# EAGLE board inktime_schem_2d (EAGLE 9.7.0)
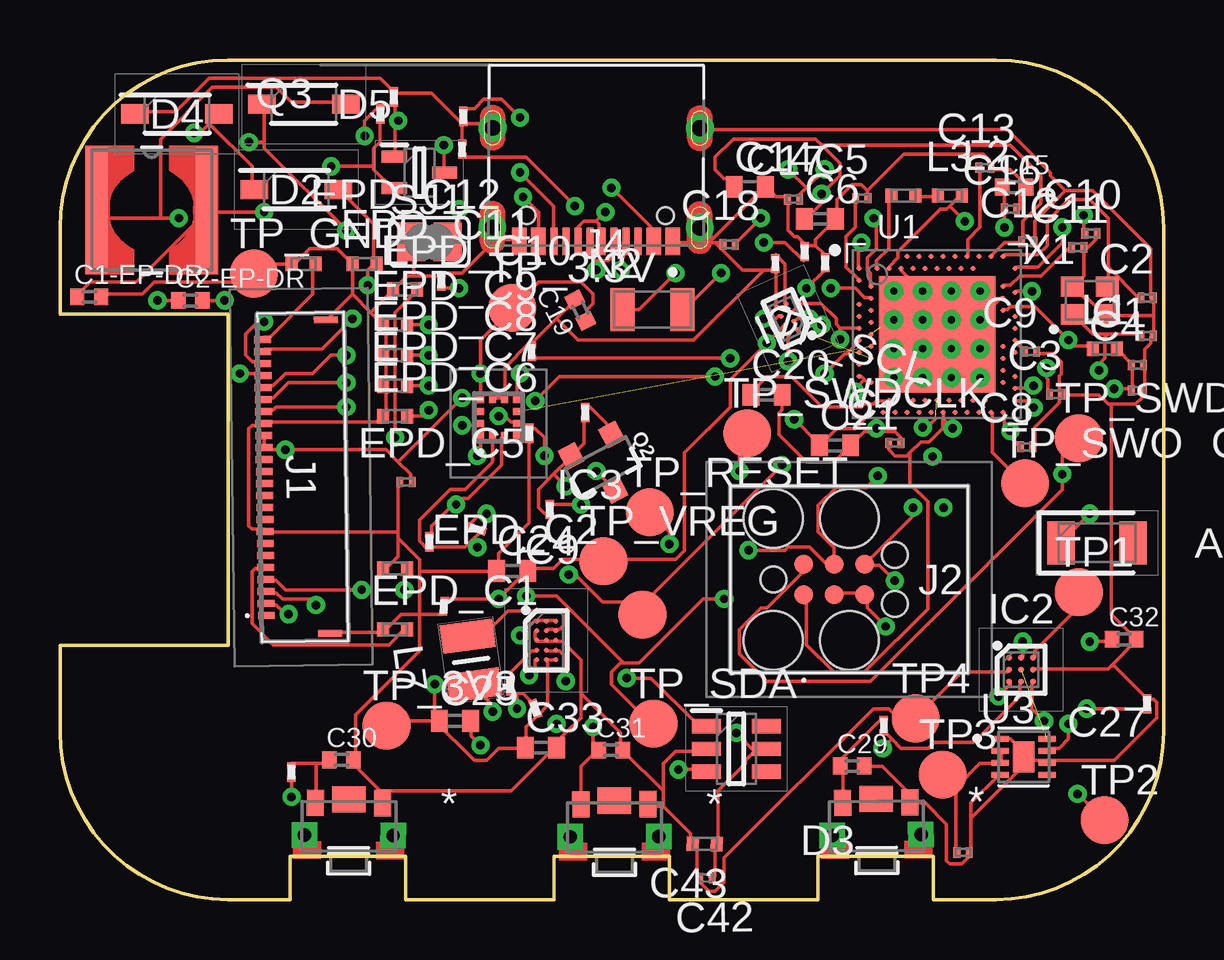
[diagram p0: board, top side]
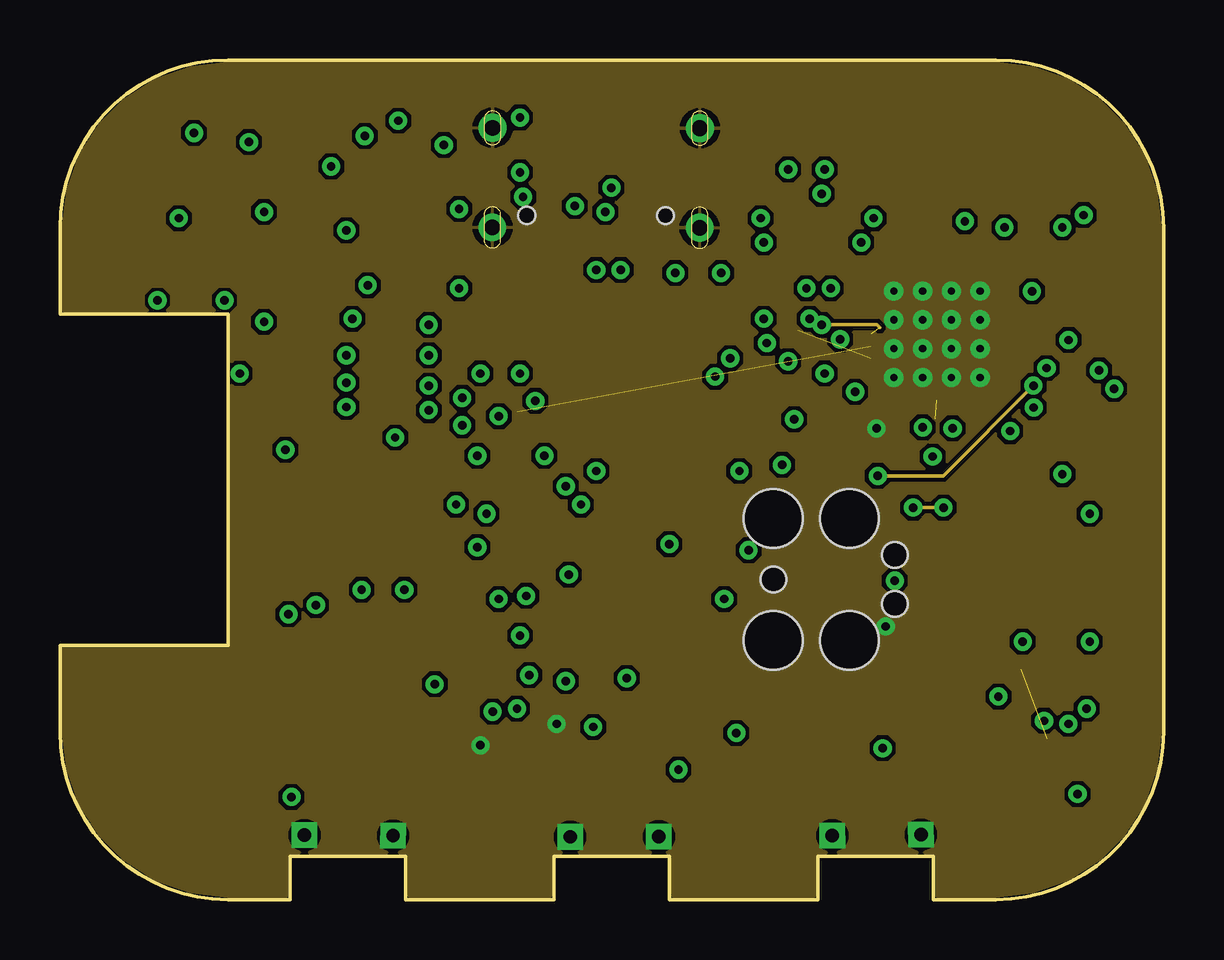
[diagram p1: board, inner layer Route2]
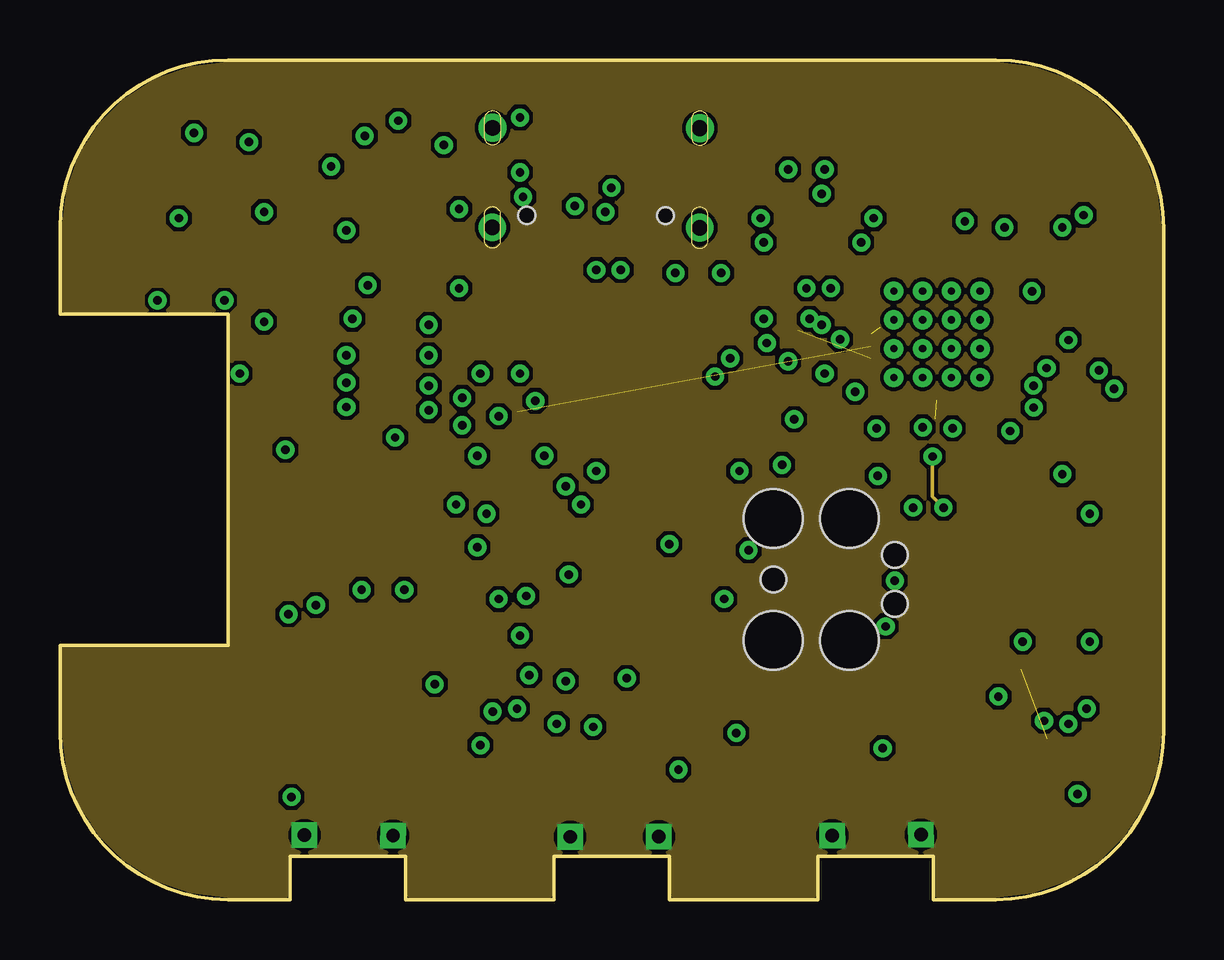
[diagram p2: board, inner layer Route63]
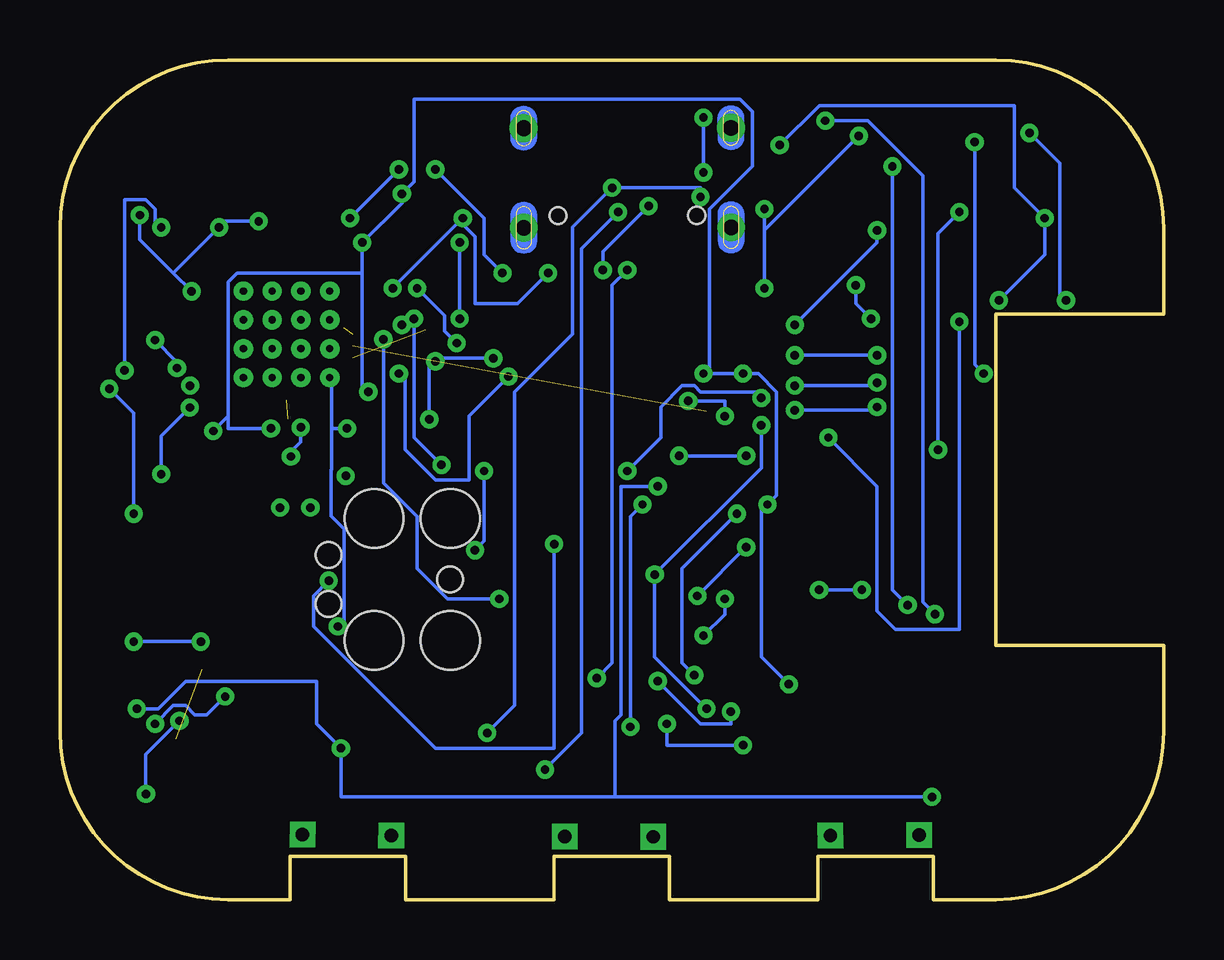
[diagram p3: board, bottom side, seen from below]

Size 46 x 35 mm. Coordinates in mm from the lower left corner, seen from the top.
Outline: 39,0 36.4,0 36.4,1.8 31.6,1.8 31.6,0 25.4,0 25.4,1.8 20.6,1.8 20.6,0 14.4,0 14.4,1.8 9.6,1.8 9.6,0 7,0 arc-90 0,7 0,10.6 7,10.6 7,24.4 0,24.4 0,28 arc-90 7,35 39,35 arc-90 46,28 46,7 arc-90 39,0
Copper layers (1+2*15+16): Top / Route2 / Route63 / Bottom
Stack-up 4 Layer Stack: Top SilkScreen Epoxy Ink / Top SolderMask SR:Green 0.0254mm Dk 4.3 / Top Surface Finish Lead-Free 0.02mm / Top CuFoil:007 0.035mm / Dielectric-1 Prepreg:001 0.064mm / Dielectric-2 Prepreg:001 0.064mm / Route2 CuFoil:007 0.035mm / Dielectric-3 Core:066 0.711mm / Route63 CuFoil:007 0.035mm / Dielectric-4 Prepreg:001 0.064mm / Dielectric-5 Prepreg:001 0.064mm / Bottom CuFoil:007 0.035mm / Bottom Surface Finish Lead-Free 0.02mm / Bottom SolderMask SR:Green 0.0254mm Dk 4.3 / Bottom SilkScreen Epoxy Ink
Design rules: minimum copper width 1mil, minimum drill size 0.35mm, copper clearance wire_polygon to wire_polygon 6mil, copper clearance wire_polygon to pad_smd 6mil, copper clearance wire_polygon to via 6mil, copper clearance pad_smd to pad_smd 6mil, copper clearance pad_smd to via 6mil, copper clearance via to via 6mil, copper clearance smd to pad (same net) 6mil, copper clearance smd to via (same net) 6mil, copper clearance smd to smd (same net) 6mil, dimension clearance 0.002540625mm, via restrict clearance 0mil, restrict clearance 0mil, drill distance 6mil, keepout clearance 0mil

## Footprints (pad centres in the part's own frame; a part is rotated, then mirrored left to right if it is on the bottom)
2450AT18B100E_ANTC3216X140N = smd 1.15 x 1.8: 1 -1.5,0; 2 1.5,0
NORDIC_NRF_3_RESC0201_L = smd 0.28 x 0.43: 1 -0.255,0; 2 0.255,0
PERFECT_0402_0402 = smd 0.6 x 0.7: 1 -0.5,0; 2 0.5,0
ESP32_C6_LIBRARY_1_ESP32_WROVER_EAGLE-LTSPICE_C0402 = smd 0.7 x 0.9: 1 -0.65,0; 2 0.65,0
GRM011R60J152KE01L_1_0201 = smd 0.35 x 0.25: 1 0,0.275; 2 0,-0.275
NORDIC_NRF_3_RESC0402_L = smd 0.5 x 0.6: 1 -0.5,0; 2 0.5,0
ESP32_C6_LIBRARY_5_SOD3716X135N = smd 1.15 x 0.8: 1 -1.75,0; 2 1.75,0
ESP32_C6_LIBRARY_3_SOT95P280X145-6N = smd 1.2 x 0.6: 1 -1.25,0.95; 2 -1.25,0; 3 -1.25,-0.95; 4 1.25,-0.95; 5 1.25,0; 6 1.25,0.95
BQ25180YBGR_BGA8C40P2X4_100X155X50 = smd 0.2 x 0.2: A1 -0.2,0.6; A2 0.2,0.6; B1 -0.2,0.2; B2 0.2,0.2; C1 -0.2,-0.2; C2 0.2,-0.2; D1 -0.2,-0.6; D2 0.2,-0.6
DRV2605YZFR_BGA9C50P3X3_144X144X62 = smd 0.25 x 0.25: A1 -0.5,0.5; A2 0,0.5; A3 0.5,0.5; B1 -0.5,0; B2 0,0; B3 0.5,0; C1 -0.5,-0.5; C2 0,-0.5; C3 0.5,-0.5
BMA423_BMA423 = smd 0.3 x 0.35: 1 -0.75,-0.775; 2 -0.25,-0.775; 3 0.25,-0.775; 4 0.75,-0.775; 7 0.75,0.775; 8 0.25,0.775; 9 -0.25,0.775; 10 -0.75,0.775 | smd 0.35 x 0.3: 5 0.775,-0.25; 6 0.775,0.25; 11 -0.775,0.25; 12 -0.775,-0.25
RT6160AWSC_BGA15C40P3X5_140X230X60 = smd 0.216 x 0.216: A1 -0.4,0.8; A2 0,0.8; A3 0.4,0.8; B1 -0.4,0.4; B2 0,0.4; B3 0.4,0.4; C1 -0.4,0; C2 0,0; C3 0.4,0; D1 -0.4,-0.4; D2 0,-0.4; D3 0.4,-0.4; E1 -0.4,-0.8; E2 0,-0.8; E3 0.4,-0.8
503480-2400_5034802400 = smd 0.3 x 0.7: 1 -5.75,1.525; 2 -5.25,1.525; 3 -4.75,1.525; 4 -4.25,1.525; 5 -3.75,1.525; 6 -3.25,1.525; 7 -2.75,1.525; 8 -2.25,1.525; 9 -1.75,1.525; 10 -1.25,1.525; 11 -0.75,1.525; 12 -0.25,1.525; 13 0.25,1.525; 14 0.75,1.525; 15 1.25,1.525; 16 1.75,1.525; 17 2.25,1.525; 18 2.75,1.525; 19 3.25,1.525; 20 3.75,1.525; 21 4.25,1.525; 22 4.75,1.525; 23 5.25,1.525; 24 5.75,1.525 | smd 0.3 x 1: MP1 -6.54,-1.125; MP2 6.54,-1.125
TC2030-IDC_TC2030IDC = smd 0.783 x 0.783: 1 -0.953,-0.635; 2 -0.953,0.635; 3 0.317,-0.635; 4 0.317,0.635; 5 1.588,-0.635; 6 1.588,0.635 | hole 2.451: -2.223,-2.54; -2.223,2.54; 0.952,-2.54; 0.952,2.54 | hole 1.067: -2.223,0; 2.857,-1.016; 2.857,1.016
KH-TYPE-C-16P_KINGHELM_KH-TYPE-C-16P = smd 0.6 x 1.15: A1_B12 -3.2,4.725; A4_B9 -2.4,4.725; A9_B4 2.4,4.725; A12_B1 3.2,4.725 | smd 0.3 x 1.15: A5 -1.25,4.725; A6 -0.25,4.725; A7 0.25,4.725; A8 1.25,4.725; B5 1.75,4.725; B6 0.75,4.725; B7 -0.75,4.725; B8 -1.75,4.725 | drill 0.65 pad 1.05: SH1 -4.32,0; SH2 4.32,0; SH3 -4.32,4.15; SH4 4.32,4.15 | hole 0.7: -2.89,3.65; 2.89,3.65
NORDIC_NRF_2_RESC0402_L = smd 0.5 x 0.6: 1 -0.5,0; 2 0.5,0
ESP32_C6_LIBRARY_2_IND_4828-WE-TPC_WRE = smd 0.9 x 5.3: 1 -2.286,0; 2 2.286,0
MLP2016SR47MT0S1_INDC2016X100N = smd 1.2 x 2.2: 1 -1.028,0; 2 1.028,0
NORDIC_NRF_1_XTAL_3215_N = smd 1 x 1.8: 1 -1.25,0; 2 1.25,0
ESP32_C6_LIBRARY_4_ESP32_C6_LIBRARY_4_ESP32_C6_LIBRARY_4_ESP32_C6_LIBRARY_4_ESP32_WROVER_SPARKFUN-DISCRETESEMI_SOT23-3 = smd 0.8 x 0.9: 1 -0.95,-1; 2 0.95,-1; 3 0,1.1
ESP32_C6_LIBRARY_6_SOT65P210X110-3N = smd 1.05 x 0.5: 1 -1.05,0.65; 2 -1.05,-0.65; 3 1.05,0
ERA-1AEB3401C_0201 = smd 0.35 x 0.25: 1 0,0.275; 2 0,-0.275
CPF0201D7K68C1_0201 = smd 0.35 x 0.25: 1 0,0.275; 2 0,-0.275
ESP32_C6_LIBRARY_7_JUMPER_SJ = smd 1.168 x 1.6: 1 -0.762,0; 2 0.762,0
2025-10-22_07-23-44_LIBRARY_SW_EVP-AKE31A_PAN = smd 0.711 x 1.092: 1 -1.4,-0.972; 2 1.4,-0.972 | drill 0.559 pad 0.914 square: 3 -1.848,0.381; 4 1.848,0.381 | smd 1.397 x 1.092: 5 0,-1.124
HECTOR_WATCH_1_TP20R = smd 2 x 2: TP 0,0
NORDIC_NRF_4_AQFN50P700X700X85_HS-74N = smd 4.85 x 4.85: P$74 0,0 | drill 0.3 pad 0.6: P$75 -1.8,1.8; P$76 -0.6,1.8; P$77 0.6,1.8; P$78 1.8,1.8; P$79 -1.8,0.6; P$80 -0.6,0.6; P$81 0.6,0.6; P$82 1.8,0.6; P$83 -1.8,-0.6; P$84 -0.6,-0.6; P$85 0.6,-0.6; P$86 1.8,-0.6; P$87 -1.8,-1.8; P$88 -0.6,-1.8; P$89 0.6,-1.8; P$90 1.8,-1.8 | smd 0.2 x 0.2: P$A8 -1.25,3.25; P$A10 -0.75,3.25; P$A12 -0.25,3.25; P$A14 0.25,3.25; P$A16 0.75,3.25; P$A18 1.25,3.25; P$A20 1.75,3.25; P$A22 2.25,3.25; P$A23 2.75,3.25; P$AA24 3.25,-2.25; P$AB2 -2.75,-2.5; P$AC5 -2,-2.75; P$AC9 -1,-2.75; P$AC11 -0.5,-2.75; P$AC13 0,-2.75; P$AC15 0.5,-2.75; P$AC17 1,-2.75; P$AC19 1.5,-2.75; P$AC21 2,-2.75; P$AC24 3.25,-2.75; P$AD2 -2.75,-3.25; P$AD4 -2.25,-3.25; P$AD6 -1.75,-3.25; P$AD8 -1.25,-3.25; P$AD10 -0.75,-3.25; P$AD12 -0.25,-3.25; P$AD14 0.25,-3.25; P$AD16 0.75,-3.25; P$AD18 1.25,-3.25; P$AD20 1.75,-3.25; P$AD22 2.25,-3.25; P$AD23 2.75,-3.25; P$B1 -3.25,2.75; P$B3 -2.5,2.75; P$B5 -2,2.75; P$B7 -1.5,2.75; P$B9 -1,2.75; P$B11 -0.5,2.75; P$B13 0,2.75; P$B15 0.5,2.75; P$B17 1,2.75; P$B19 1.5,2.75; P$B24 3.25,2.75; P$C1 -3.25,2.25; P$D2 -2.75,2; P$D23 2.75,2; P$E24 3.25,1.75; P$F2 -2.75,1.5; P$F23 2.75,1.5; P$G1 -3.25,1.25; P$H2 -2.75,1; P$H23 2.75,1; P$J1 -3.25,0.75; P$J24 3.25,0.75; P$K2 -2.75,0.5; P$L1 -3.25,0.25; P$L24 3.25,0.25; P$M2 -2.75,0; P$N1 -3.25,-0.25; P$N24 3.25,-0.25; P$P2 -2.75,-0.5; P$P23 2.75,-0.5; P$R1 -3.25,-0.75; P$R24 3.25,-0.75; P$T2 -2.75,-1; P$T23 2.75,-1; P$U1 -3.25,-1.25; P$U24 3.25,-1.25; P$V23 2.75,-1.5; P$W1 -3.25,-1.75; P$W24 3.25,-1.75; P$Y2 -2.75,-2; P$Y23 2.75,-2
ESP32_C6_LIBRARY_SON50P200X200X80-9N = smd 0.76 x 0.27: 1 -0.985,0.75; 2 -0.985,0.25; 3 -0.985,-0.25; 4 -0.985,-0.75; 5 0.985,-0.75; 6 0.985,-0.25; 7 0.985,0.25; 8 0.985,0.75 | smd 0.9 x 1.3: 9 0,0
NORDIC_NRF_BT-XTAL_2016_N = smd 0.95 x 0.85: 1 -0.725,-0.575; 2 0.725,-0.575; 3 0.725,0.575; 4 -0.725,0.575

## Placement (x,y rotation side)
ANT1  2450AT18B100E_2450AT18B100E  [2450AT18B100E_ANTC3216X140N]  43.23,14.87 0 top
C1  12pF  [NORDIC_NRF_3_RESC0201_L]  45.31,23.5 0 top
C1-EP-DR  10uF  [PERFECT_0402_0402]  1.22,25.13 0 top
C2  12pF  [NORDIC_NRF_3_RESC0201_L]  45.31,25.08 0 top
C2-EP-DR  4.7uF  [PERFECT_0402_0402]  5.44,24.98 0 top
C3  1pF  [NORDIC_NRF_3_RESC0201_L]  41.5,21.06 0 top
C4  1pF  [NORDIC_NRF_3_RESC0201_L]  44.91,22.28 0 top
C5  100nF  [NORDIC_NRF_3_RESC0201_L]  33.43,29.24 0 top
C6  4.7uF  [ESP32_C6_LIBRARY_1_ESP32_WROVER_EAGLE-LTSPICE_C0402]  31.68,28.38 0 top
C7  100nF  [NORDIC_NRF_3_RESC0201_L]  34.8,19.03 0 top
C8  100nF  [NORDIC_NRF_3_RESC0201_L]  40.3,18.87 0 top
C9  820pF  [NORDIC_NRF_3_RESC0201_L]  40.45,22.84 0 top
C10  N.C.  [NORDIC_NRF_3_RESC0201_L]  42.98,27.77 0 top
C11  100pF  [NORDIC_NRF_3_RESC0201_L]  42.42,27.19 0 top
C12  100nF  [NORDIC_NRF_3_RESC0201_L]  40.34,27.41 0 top
C13  N.C.  [NORDIC_NRF_3_RESC0201_L]  38.56,30.51 0 top
C14  4.7uF  [ESP32_C6_LIBRARY_1_ESP32_WROVER_EAGLE-LTSPICE_C0402]  28.75,29.7 0 top
C15  1.0uF  [PERFECT_0402_0402]  39.78,29.7 0 top
C16  47nF  [NORDIC_NRF_3_RESC0201_L]  39.62,28.79 0 top
C17  12pF  [NORDIC_NRF_3_RESC0201_L]  30.58,29.19 0 top
C18  12pF  [NORDIC_NRF_3_RESC0201_L]  27.89,27.31 0 top
C19  100nF  [PERFECT_0402_0402]  21.69,24.57 117.1 top
C20  4.7uF  [ESP32_C6_LIBRARY_1_ESP32_WROVER_EAGLE-LTSPICE_C0402]  29.46,21.04 0 top
C21  4.7uF  [ESP32_C6_LIBRARY_1_ESP32_WROVER_EAGLE-LTSPICE_C0402]  32.31,18.93 0 top
C22  N.C.  [NORDIC_NRF_3_RESC0201_L]  44.91,21.22 0 top
C23  0.1uF  [GRM011R60J152KE01L_1_0201]  16,12.23 355.6 top
C24  10uF  [ESP32_C6_LIBRARY_1_ESP32_WROVER_EAGLE-LTSPICE_C0402]  18.85,13.7 0 top
C25  22uF  [ESP32_C6_LIBRARY_1_ESP32_WROVER_EAGLE-LTSPICE_C0402]  16.46,7.45 0 top
C27  0.1uF  [NORDIC_NRF_3_RESC0201_L]  37.64,1.96 0 top
C29  1uF  [PERFECT_0402_0402]  33.02,5.57 0 top
C30  1uF  [PERFECT_0402_0402]  11.73,5.82 0 top
C31  1uF  [PERFECT_0402_0402]  22.96,6.23 0 top
C32  1uF  [PERFECT_0402_0402]  44.35,10.85 0 top
C33  22uF  [ESP32_C6_LIBRARY_1_ESP32_WROVER_EAGLE-LTSPICE_C0402]  20.04,6.33 0 top
C34  0.1uF  [GRM011R60J152KE01L_1_0201]  45.31,8.16 0 top
C37  1uF  [GRM011R60J152KE01L_1_0201]  31.04,27.01 0 top
C38  1uF  [GRM011R60J152KE01L_1_0201]  19.66,22.84 0 top
C39  10uF  [GRM011R60J152KE01L_1_0201]  31.9,26.55 0 top
C42  0.1uF  [NORDIC_NRF_3_RESC0201_L]  26.92,0.9 180.8 top
C43  4.7uF  [NORDIC_NRF_3_RESC0402_L]  26.87,2.32 179.3 top
D2  MBR0530  [ESP32_C6_LIBRARY_5_SOD3716X135N]  9.86,29.6 0 top
D3  ESP32_C6_LIBRARY_3_USBLC6-2SC6Y  [ESP32_C6_LIBRARY_3_SOT95P280X145-6N]  28.19,6.28 0 top
D4  MBR0530  [ESP32_C6_LIBRARY_5_SOD3716X135N]  4.88,32.75 0 top
D5  MBR0530  [ESP32_C6_LIBRARY_5_SOD3716X135N]  10.16,33.15 0 top
EPD_C1  1uF  [NORDIC_NRF_3_RESC0402_L]  13.97,11.26 0 top
EPD_C2  1uF  [NORDIC_NRF_3_RESC0402_L]  13.97,13.8 0 top
EPD_C5  0.1uF  [NORDIC_NRF_3_RESC0201_L]  14.43,17.41 0 top
EPD_C6  1uF  [NORDIC_NRF_3_RESC0402_L]  13.97,20.15 0 top
EPD_C7  1uF  [NORDIC_NRF_3_RESC0402_L]  13.97,21.42 0 top
EPD_C8  1uF  [NORDIC_NRF_3_RESC0402_L]  13.97,22.69 0 top
EPD_C9  1uF  [NORDIC_NRF_3_RESC0402_L]  13.97,23.96 0 top
EPD_C10  1uF  [NORDIC_NRF_3_RESC0402_L]  14.38,25.43 0 top
EPD_C11  1uF  [NORDIC_NRF_3_RESC0402_L]  12.7,26.5 0 top
EPD_C12  1uF  [NORDIC_NRF_3_RESC0402_L]  10.16,26.5 0 top
IC1  BQ25180YBGR_BQ25180YBGR  [BQ25180YBGR_BGA8C40P2X4_100X155X50]  30.33,24.21 204.1 top
IC2  DRV2605YZFR_DRV2605YZFR  [DRV2605YZFR_BGA9C50P3X3_144X144X62]  40.07,9.58 0 top
IC3  BMA423_BMA423  [BMA423_BMA423]  18.28,20.1 0 top
IC9  RT6160AWSC_RT6160AWSC  [RT6160AWSC_BGA15C40P3X5_140X230X60]  20.27,10.8 0 top
J1  503480-2400_503480-2400  [503480-2400_5034802400]  10.05,17.61 90.8 top
J2  TC2030-IDC_TC2030-IDC  [TC2030-IDC_TC2030IDC]  31.95,13.34 0 top
J4  KH-TYPE-C-16P_KH-TYPE-C-16P  [KH-TYPE-C-16P_KINGHELM_KH-TYPE-C-16P]  22.35,32.16 179.9 top
L1  3.9nH  [NORDIC_NRF_2_RESC0402_L]  43.56,22.96 0 top
L2  10uH  [NORDIC_NRF_2_RESC0402_L]  35.15,29.34 0 top
L3  15nH  [NORDIC_NRF_2_RESC0402_L]  37.08,29.34 0 top
L5  68uH  [ESP32_C6_LIBRARY_2_IND_4828-WE-TPC_WRE]  3.82,28.74 0 top
L7  MLP2016SR47MT0S1_FTC252012SR47MBCA  [MLP2016SR47MT0S1_INDC2016X100N]  17.13,9.97 277.8 top
N2  32.768kHz  [NORDIC_NRF_1_XTAL_3215_N]  24.7,24.59 0 top
Q2  20V/4.2A/52mΩ/1.4W  [ESP32_C6_LIBRARY_4_ESP32_C6_LIBRARY_4_ESP32_C6_LIBRARY_4_ESP32_C6_LIBRARY_4_ESP32_WROVER_SPARKFUN-DISCRETESEMI_SOT23-3]  22.62,18.06 207.9 top
Q3  ESP32_C6_LIBRARY_6_SI1308EDL-T1-GE3  [ESP32_C6_LIBRARY_6_SOT65P210X110-3N]  14.99,30.31 0 top
R1_EP_DR  0.47  [ERA-1AEB3401C_0201]  13.36,32.75 0 top
R1_USB  5K1  [CPF0201D7K68C1_0201]  16.76,31.28 0 top
R2  0  [ERA-1AEB3401C_0201]  17.37,15.45 72.9 top
R2_EP_DR  10K  [ERA-1AEB3401C_0201]  13.92,33.46 0 top
R2_USB  5K1  [CPF0201D7K68C1_0201]  16.81,32.65 0 top
R3  0  [ERA-1AEB3401C_0201]  19.56,19.44 0 top
R4  0  [ERA-1AEB3401C_0201]  18.77,8.91 0 top
R5  10k  [ERA-1AEB3401C_0201]  9.65,5.32 0 top
R7  10k  [ERA-1AEB3401C_0201]  34.34,7.25 0 top
R8  10k  [ERA-1AEB3401C_0201]  20.42,16.25 0 top
R9  10k  [CPF0201D7K68C1_0201]  29.82,26.51 0 top
R17  3k3  [ERA-1AEB3401C_0201]  19.81,7.96 198.5 top
R18  3k3  [ERA-1AEB3401C_0201]  15.39,14.92 0 top
R_PWR_EPD  10K  [CPF0201D7K68C1_0201]  21.89,20.3 0 top
R_TYPE_SEL  2.2  [ERA-1AEB3401C_0201]  15.9,25.79 0 top
SJ1  [ESP32_C6_LIBRARY_7_JUMPER_SJ]  15.39,27.41 0 top
SW_DN  2025-10-22_07-23-44_LIBRARY_EVP-AKE31ASW_EVP-AKE31A_PAN  [2025-10-22_07-23-44_LIBRARY_SW_EVP-AKE31A_PAN]  34.04,3.07 180.6 top
SW_ENT  2025-10-22_07-23-44_LIBRARY_EVP-AKE31ASW_EVP-AKE31A_PAN  [2025-10-22_07-23-44_LIBRARY_SW_EVP-AKE31A_PAN]  23.11,3 180.2 top
SW_UP  2025-10-22_07-23-44_LIBRARY_EVP-AKE31ASW_EVP-AKE31A_PAN  [2025-10-22_07-23-44_LIBRARY_SW_EVP-AKE31A_PAN]  12.04,3.06 179.7 top
TP1  HECTOR_WATCH_1_TPTP20R  [HECTOR_WATCH_1_TP20R]  42.47,12.81 0 top
TP2  HECTOR_WATCH_1_TPTP20R  [HECTOR_WATCH_1_TP20R]  43.55,3.31 0 top
TP3  HECTOR_WATCH_1_TPTP20R  [HECTOR_WATCH_1_TP20R]  36.8,5.21 0 top
TP4  HECTOR_WATCH_1_TPTP20R  [HECTOR_WATCH_1_TP20R]  35.67,7.55 0 top
TP_3.3V  HECTOR_WATCH_1_TPTP20R  [HECTOR_WATCH_1_TP20R]  18.85,24.67 0 top
TP_3V3  HECTOR_WATCH_1_TPTP20R  [HECTOR_WATCH_1_TP20R]  13.61,7.25 0 top
TP_GND  HECTOR_WATCH_1_TPTP20R  [HECTOR_WATCH_1_TP20R]  8.08,26.09 0 top
TP_RESET  HECTOR_WATCH_1_TPTP20R  [HECTOR_WATCH_1_TP20R]  24.59,16.14 0 top
TP_SCL  HECTOR_WATCH_1_TPTP20R  [HECTOR_WATCH_1_TP20R]  24.28,11.87 341.9 top
TP_SDA  HECTOR_WATCH_1_TPTP20R  [HECTOR_WATCH_1_TP20R]  24.74,7.33 0 top
TP_SWDCLK  HECTOR_WATCH_1_TPTP20R  [HECTOR_WATCH_1_TP20R]  28.65,19.44 0 top
TP_SWDIO  HECTOR_WATCH_1_TPTP20R  [HECTOR_WATCH_1_TP20R]  42.47,19.24 0 top
TP_SWO  HECTOR_WATCH_1_TPTP20R  [HECTOR_WATCH_1_TP20R]  40.23,17.36 0 top
TP_VREG  HECTOR_WATCH_1_TPTP20R  [HECTOR_WATCH_1_TP20R]  22.66,14.11 0 top
U1  NORDIC_NRF_4_NRF52840_QF  [NORDIC_NRF_4_AQFN50P700X700X85_HS-74N]  36.55,23.56 0 top
U3  ESP32_C6_LIBRARY_MAX17048G+T10  [ESP32_C6_LIBRARY_SON50P200X200X80-9N]  40.17,5.95 0 top
X1  32MHz  [NORDIC_NRF_BT-XTAL_2016_N]  42.93,24.98 0 top

## Library data of the parts
ANT1 = InkTime_v5; ARROW_PART_NUMBER: 2450AT18B100E; ARROW_PRICE-STOCK: https://www.arrow.com/en/products/2450at18b100e/johanson-dielectrics?utm_currency=USD&region=nac; DESCRIPTION: Antennas 2.45GHz ANTENNA; HEIGHT: 1.4mm; MANUFACTURER_NAME: JOHANSON TECHNOLOGY; MANUFACTURER_PART_NUMBER: 2450AT18B100E; MOUSER_PART_NUMBER: 609-2450AT18B100E; MOUSER_PRICE-STOCK: https://www.mouser.co.uk/ProductDetail/Johanson-Technology/2450AT18B100E?qs=yCnrNFeXz%252Bh5MFsFIXGZGA%3D%3D
C1 C1-EP-DR C2 C2-EP-DR C3-C5 C7-C13 C15-C19 C22 C23 C27 C29-C32 C34 C37-C39 C42 C43 EPD_C1 EPD_C2 EPD_C5-EPD_C12 L1-L3 N2 R1_EP_DR R1_USB R2 R2_EP_DR R2_USB R3-R5 R7-R9 R17 R18 R_PWR_EPD R_TYPE_SEL SJ1 TP1-TP4 TP_3.3V TP_3V3 TP_GND TP_RESET TP_SCL TP_SDA TP_SWDCLK TP_SWDIO TP_SWO TP_VREG U1 X1 = InkTime_v5
C6 C14 C20 C21 C24 C25 C33 = InkTime_v5; SPICEMODEL: NONE; SPICEPREFIX: C
D2 D4 D5 = InkTime_v5; AVAILABILITY: In Stock; CHECK_PRICES: https://www.snapeda.com/parts/MBR0530/Onsemi/view-part/?ref=eda; DESCRIPTION: Diode Schottky 30 V 500mA Surface Mount SOD-123; MF: ON Semiconductor; MP: MBR0530; PACKAGE: SOD-123-2 ON Semiconductor; PRICE: None; PURCHASE-URL: https://www.snapeda.com/api/url_track_click_mouser/?unipart_id=179458&manufacturer=ON Semiconductor&part_name=MBR0530&search_term=None; SNAPEDA_LINK: https://www.snapeda.com/parts/MBR0530/Onsemi/view-part/?ref=snap
D3 = InkTime_v5; AVAILABILITY: In Stock; CHECK_PRICES: https://www.snapeda.com/parts/USBLC6-2SC6Y/STMicroelectronics/view-part/?ref=eda; DESCRIPTION: 17V Clamp 5A (8/20µs) Ipp Tvs Diode Surface Mount SOT-23-6; MF: STMicroelectronics; MP: USBLC6-2SC6Y; PACKAGE: SOT-23-6 STMicroelectronics; PRICE: None; SNAPEDA_LINK: https://www.snapeda.com/parts/USBLC6-2SC6Y/STMicroelectronics/view-part/?ref=snap
IC1 = InkTime_v5; ARROW_PART_NUMBER: BQ25180YBGR; ARROW_PRICE-STOCK: https://www.arrow.com/en/products/bq25180ybgr/texas-instruments?utm_currency=USD&region=nac; DESCRIPTION: Charger IC Lithium Ion/Polymer, Lithium Iron Phosphate 8-DSBGA (1.6x1.1); HEIGHT: 0.5mm; MANUFACTURER_NAME: Texas Instruments; MANUFACTURER_PART_NUMBER: BQ25180YBGR; MOUSER_PART_NUMBER: 595-BQ25180YBGR; MOUSER_PRICE-STOCK: https://www.mouser.co.uk/ProductDetail/Texas-Instruments/BQ25180YBGR?qs=doiCPypUmgEWjAK%252BJAX6Tw%3D%3D
IC2 = InkTime_v5; ARROW_PART_NUMBER: DRV2605YZFR; ARROW_PRICE-STOCK: https://www.arrow.com/en/products/drv2605yzfr/texas-instruments?region=nac; DESCRIPTION: Haptic Driver for ERM/LRA with Built-In Library and Smart Loop Architecture; HEIGHT: 0.625mm; MANUFACTURER_NAME: Texas Instruments; MANUFACTURER_PART_NUMBER: DRV2605YZFR
IC3 = InkTime_v5; ARROW_PART_NUMBER: BMA423; ARROW_PRICE-STOCK: https://www.arrow.com/en/products/bma423/bosch; DESCRIPTION: Accelerometers Triaxial low-g 12bit Acceleration Sensor; HEIGHT: 1mm; MANUFACTURER_NAME: BOSCH; MANUFACTURER_PART_NUMBER: BMA423; MOUSER_PART_NUMBER: 262-BMA423; MOUSER_PRICE-STOCK: https://www.mouser.co.uk/ProductDetail/Bosch-Sensortec/BMA423?qs=HXFqYaX1Q2xC%252BSgeGoX3mg%3D%3D
IC9 = InkTime_v5; DESCRIPTION: Buck-Boost Regulator Positive Output Step-Up/Step-Down I2C DC-DC Controller IC 15-WL-CSP (BSC) (1.4x2.3); HEIGHT: 0.6mm; MANUFACTURER_NAME: RICHTEK; MANUFACTURER_PART_NUMBER: RT6160AWSC; MOUSER_PART_NUMBER: 835-RT6160AWSC; MOUSER_PRICE-STOCK: https://www.mouser.co.uk/ProductDetail/Richtek/RT6160AWSC?qs=amGC7iS6iy%2FLd9PSoixZXQ%3D%3D
J1 = InkTime_v5; DESCRIPTION: FFC & FPC Connectors 0.5mm FPC RA SMT Dual Contact 24Ckt; HEIGHT: 1.87mm; MANUFACTURER_NAME: Molex; MANUFACTURER_PART_NUMBER: 503480-2400; MOUSER_PART_NUMBER: 538-503480-2400; MOUSER_PRICE-STOCK: https://www.mouser.co.uk/ProductDetail/Molex/503480-2400?qs=OAhjpuo3Vu7efIoxFh9AOw%3D%3D
J2 = InkTime_v5; DESCRIPTION: CABLE ADAPTER 6 POS; HEIGHT: 19mm; MANUFACTURER_NAME: Tag Connect; MANUFACTURER_PART_NUMBER: TC2030-IDC
J4 = InkTime_v5; AVAILABILITY: Not in stock; CHECK_PRICES: https://www.snapeda.com/parts/KH-TYPE-C-16P/Kinghelm/view-part/?ref=eda; MF: kinghelm; MP: KH-TYPE-C-16P; PACKAGE: None; PRICE: None; SNAPEDA_LINK: https://www.snapeda.com/parts/KH-TYPE-C-16P/Kinghelm/view-part/?ref=snap
L5 = InkTime_v5; COPYRIGHT: Copyright (C) 2024 Ultra Librarian. All rights reserved.; MANUFACTURER_PART_NUMBER: 744043680; MFR_NAME: Wurth Electronics
L7 = InkTime_v5; DESCRIPTION: SMD / SMT Inductors (Coils), L=0.47?H, L x W x T :; HEIGHT: 1mm; JLCPCB: https://jlcpcb.com/partdetail/6763488-FTC252012SR47MBCA/C5832368; MANUFACTURER_NAME: TDK; MANUFACTURER_PART_NUMBER: FTC252012SR47MBCA
Q2 = InkTime_v5; PROD_ID: TRAN-14388
Q3 = InkTime_v5; AVAILABILITY: In Stock; CHECK_PRICES: https://www.snapeda.com/parts/SI1308EDL-T1-GE3/Vishay+Siliconix/view-part/?ref=eda; DESCRIPTION: Si1308EDL-T1-GE3 N-channel MOSFET Transistor, 1.5 A, 30 V, 3-Pin SC-70 | Siliconix / Vishay SI1308EDL-T1-GE3; MF: Vishay Siliconix; MP: SI1308EDL-T1-GE3; PACKAGE: SOT-323 Vishay Semiconductor; PRICE: None; PURCHASE-URL: https://www.snapeda.com/api/url_track_click_mouser/?unipart_id=274603&manufacturer=Vishay Siliconix&part_name=SI1308EDL-T1-GE3&search_term=None; SNAPEDA_LINK: https://www.snapeda.com/parts/SI1308EDL-T1-GE3/Vishay+Siliconix/view-part/?ref=snap
SW_DN SW_ENT SW_UP = InkTime_v5; COPYRIGHT: Copyright (C) 2025 Ultra Librarian. All rights reserved.; DIGI-KEY_PART_NUMBER_1: P123437TR-ND; DIGI-KEY_PART_NUMBER_2: P123437CT-ND; DIGI-KEY_PART_NUMBER_3: P123437DKR-ND; MANUFACTURER_NAME: Panasonic; MANUFACTURER_PART_NUMBER: EVP-AKE31A
U3 = InkTime_v5; AVAILABILITY: In Stock; CHECK_PRICES: https://www.snapeda.com/parts/MAX17048G+T10/Analog+Devices/view-part/?ref=eda; DESCRIPTION: 3µA 1-Cell/2-Cell Fuel Gauge with ModelGauge; MF: Analog Devices; MP: MAX17048G+T10; PACKAGE: TDFN-8 Maxim; PRICE: None; PURCHASE-URL: https://www.snapeda.com/api/url_track_click_mouser/?unipart_id=329239&manufacturer=Analog Devices&part_name=MAX17048G+T10&search_term=None; SNAPEDA_LINK: https://www.snapeda.com/parts/MAX17048G+T10/Analog+Devices/view-part/?ref=snap

## Nets
3V3/1.7D: C34.2 IC2.C2 Q2.2 R5.2 R7.2 R8.2 R_PWR_EPD.2
3V3/2.4A: C6.1 C7.1 C8.1 C12.1 C14.1 C19.1 C25.1 C33.1 IC3.3 IC3.7 IC3.10 IC9.E2 IC9.E3 J2.1 R17.1 R18.1 TP_3.3V.TP TP_3V3.TP U1.P$A22 U1.P$AD14 U1.P$AD23 U1.P$B1 U1.P$W1 U1.P$Y2
ALERT/1.6C: U3.5
ALERT/2.5C: U1.P$J24
D+/1.5D: D3.4
D+/2.7D: U1.P$AD6
D-/1.5D: D3.6
D-/2.7D: U1.P$AD4
DN: D3.1 J4.A7 J4.B7
DP: D3.3 J4.A6 J4.B6
EPD_3V3: C1-EP-DR.1 EPD_C5.2 J1.15 J1.16 L5.2 Q2.3
EPD_BUSY/1.5D: J1.9
EPD_BUSY/2.2D: U1.P$AC11
EPD_CS/1.4C: J1.12
EPD_CS/2.2D: U1.P$K2
EPD_DC/1.5D: J1.11
EPD_DC/2.2D: U1.P$AD10
EPD_RST/1.5D: J1.10
EPD_RST/2.2D: U1.P$AD12
GDR: J1.2 Q3.1 R2_EP_DR.2
GND: C1-EP-DR.2 C1.2 C2.2 C3.2 C4.2 C5.2 C6.2 C7.2 C8.2 C9.2 C10.2 C11.2 C12.2 C13.2 C14.2 C15.2 C16.2 C17.1 C18.1 C19.2 C20.2 C21.2 C22.2 C23.2 C24.1 C25.2 C27.2 C29.2 C30.2 C31.2 C32.2 C33.2 C34.1 C37.1 C38.1 C39.1 C42.2 C43.2 D3.2 D4.1 EPD_C1.1 EPD_C2.1 EPD_C5.1 EPD_C6.1 EPD_C7.1 EPD_C8.1 EPD_C9.1 EPD_C10.1 EPD_C11.1 EPD_C12.1 IC1.D2 IC2.B1 IC2.B3 IC3.8 IC3.9 IC9.B1 IC9.C1 IC9.C2 IC9.C3 J1.8 J1.17 J1.MP1 J1.MP2 J2.3 J2.5 J4.A1_B12 J4.A12_B1 J4.SH1 J4.SH2 J4.SH3 J4.SH4 R1_USB.1 R2_EP_DR.1 R2_USB.2 R3.2 R9.2 R_TYPE_SEL.1 SJ1.1 SW_DN.1 SW_ENT.1 SW_UP.1 TP4.TP TP_GND.TP U1.P$74 U1.P$75 U1.P$76 U1.P$77 U1.P$78 U1.P$79 U1.P$80 U1.P$81 U1.P$82 U1.P$83 U1.P$84 U1.P$85 U1.P$86 U1.P$87 U1.P$88 U1.P$89 U1.P$90 U1.P$B7 U1.P$F23 U3.1 U3.4 U3.6 U3.9 X1.2 X1.4
HAPTIC_EN/1.4C: IC2.A1
HAPTIC_EN/2.6A: U1.P$U1
IMU_INT1: IC3.5 U1.P$N1
IMU_INT2: IC3.6 U1.P$P2
LX1: IC9.B2 IC9.B3 L7.1
LX2: IC9.D2 IC9.D3 L7.2
MOSI/1.5B: J1.14
MOSI/2.2D: U1.P$B13
N$1: IC1.D1 R9.1
N$2: IC3.1 R3.1
N$3: L2.2 L3.1
N$4: C2-EP-DR.2 D5.2 L5.1 Q3.3
N$6: IC9.D1 R4.1
N$8: IC9.E1 R2.1
N$10: ANT1.1 C4.1 C22.1 L1.2
N$11: C20.1 U1.P$AC5
N$12: C2-EP-DR.1 D2.1 D4.2
N$13: C5.1 U1.P$C1
N$14: C17.2 N2.2 U1.P$D2
N$15: C18.2 N2.1 U1.P$F2
N$16: C11.1 U1.P$D23
N$17: L2.1 U1.P$B3
N$18: C10.1 C15.1 C16.1 L3.2 U1.P$B5 U1.P$E24
N$20: C2.1 U1.P$A23 X1.3
N$21: C13.1 U1.P$A18
N$22: C1.1 U1.P$B24 X1.1
N$23: C32.1 IC2.A2
N$24: C3.1 L1.1 U1.P$H23
N$27: C9.1 U1.P$N24
N$28: EPD_C2.2 J1.4
N$29: EPD_C1.2 J1.5
N$30: J4.B5 R2_USB.1
N$31: R1_EP_DR.1 R_TYPE_SEL.2 SJ1.2
N$33: J4.A5 R1_USB.2
N$41: EPD_C6.2 J1.18
N$42: EPD_C7.2 J1.19
N$43: EPD_C8.2 J1.20
N$45: EPD_C10.2 J1.22
N$47: EPD_C12.2 J1.24
OUT+: IC2.A3 TP1.TP
OUT-: IC2.C3 TP2.TP
P0.04: U1.P$J1
P0.09: U1.P$L24
P0.13/1.5D: C30.1 R5.1 SW_UP.2
P0.13/2.6C: U1.P$AD8
P0.14/1.5D: C31.1 R8.1 SW_ENT.2
P0.19: U1.P$AC15
P0.20: U1.P$AD16
P0.21: U1.P$AC17
P0.22: U1.P$AD18
P0.23: U1.P$AC19
P0.24: U1.P$AD20
P0.25: U1.P$AC21
P0.26: U1.P$G1
P0.27: U1.P$H2
P0.28: U1.P$B11
P0.29: U1.P$A10
P0.30: U1.P$B9
P0.31: U1.P$A8
P1.01/1.6C: Q2.1 R_PWR_EPD.1
P1.01/2.4B: U1.P$Y23
P1.02/1.5D: C29.1 R7.1 SW_DN.2
P1.02/2.8C: U1.P$W24
P1.03: U1.P$V23
P1.04: U1.P$U24
P1.05: U1.P$T23
P1.06: U1.P$R24
P1.07: U1.P$P23
P1.09: U1.P$R1
P1.10: U1.P$A20
P1.11: U1.P$B19
P1.12: U1.P$B17
P1.13: U1.P$A16
P1.14: U1.P$B15
P1.15: U1.P$A14
P014/2.7C: U1.P$AC9
PMIC_INT: IC1.A1 U1.P$T2
PREVGH: D5.1 EPD_C9.2 J1.21
PREVGL: D2.2 EPD_C11.2 J1.23
RESE: J1.3 Q3.2 R1_EP_DR.2
RESET: J2.6 TP_RESET.TP U1.P$AC13
SCK/1.5B: J1.13
SCK/2.2D: U1.P$A12
SCL/1.4C: IC2.C1 U3.7
SCL/2.4C: IC1.B1 IC3.12 R4.2 R17.2 TP_SCL.TP U1.P$M2
SDA/1.4C: IC2.B2 U3.8
SDA/2.4C: IC1.C1 IC3.2 R2.2 R18.2 TP_SDA.TP U1.P$L1
SWDCLK: J2.4 TP_SWDCLK.TP U1.P$AA24
SWDIO: J2.2 TP_SWDIO.TP U1.P$AC24
SWO: TP_SWO.TP U1.P$AD22
VBAT/1.2A: C27.1 TP3.TP U3.2 U3.3
VBAT/2.5C: C37.2 IC1.C2
VBUS/1.5D: C42.1 C43.1 D3.5 J4.A4_B9 J4.A9_B4
VBUS/2.6D: C21.1 C38.2 IC1.A2 U1.P$AD2
VREG: C23.1 C24.2 C39.2 IC1.B2 IC9.A1 IC9.A2 IC9.A3 TP_VREG.TP

## Tracks (layer width: path | path; a pad name or v marks a point on that pad's centre or on a via)
3V3/1.7D  (via drill 0.35)
  Top 0.152: 20.57,17.74 21.21,18.37 Q2.2 21.34,18.5 21.84,19.01 21.84,20.02 R_PWR_EPD.2 | 20.57,17.74 19.94,17.1 19.94,16.34 20.19,16.09 20.32,16.09 R8.2 | 34.67,6.69 34.42,6.94 R7.2 | 34.67,6.69 35.05,6.31 36.2,6.31 36.45,6.56 38.1,6.56 40,8.47 40,8.97 IC2.C2 | v9.65,4.28 R5.2 | 34.67,6.69 v34.29,6.31 | v42.8,7.96 45.21,7.96 C34.2 | v21.08,17.23 20.57,17.74
  Bottom 0.152: 22.86,4.28 34.29,4.28 v34.29,6.31 35.31,7.32 35.31,9.1 40.77,9.1 41.91,7.96 v42.8,7.96 | 22.86,4.28 v9.65,4.28 | v21.08,17.23 22.61,17.23 22.61,7.7 22.86,7.45 22.86,4.28
3V3/2.4A  (via drill 0.35)
  Top 0.152: 20.32,9.99 20.57,9.99 IC9.E3 | 20.32,9.99 20.32,8.09 19.94,7.7 R17.1 19.81,7.58 19.43,7.2 19.43,6.43 C33.1 19.3,6.31 18.29,6.31 17.78,5.8 17.27,5.8 15.62,7.45 | 20.32,9.99 IC9.E2 | 15.62,7.45 13.84,7.45 13.72,7.32 TP_3V3.TP | 15.62,7.45 C25.1 | 16.38,16.47 16.64,16.72 17.02,16.72 18.42,18.12 18.42,19.26 IC3.3 | 16.38,16.47 15.49,15.58 15.49,15.2 R18.1 | IC3.10 17.53,20.91 v17.53,21.93 17.53,23.33 18.8,24.6 TP_3.3V.TP 18.92,24.72 19.94,25.74 21.72,25.74 22.23,25.23 22.23,24.85 21.97,24.6 21.97,24.21 C19.1 | v19.18,21.93 19.05,21.8 19.05,20.91 IC3.7 | v16.51,16.47 16.38,16.47 | v15.62,8.97 15.62,7.45 | 36.83,20.02 36.83,20.28 U1.P$AD14 | 35.43,18.63 35.31,18.5 34.8,18.5 34.54,18.75 34.54,19.01 C7.1 | J2.1 31.11,12.66 31.11,10.62 32.26,9.48 33.53,9.48 36.17,12.12 36.17,16.59 35.43,17.33 35.43,18.63 | 39.37,19.64 39.37,19.52 40,18.88 C8.1 | 39.37,19.64 39.37,20.28 U1.P$AD23 | U1.P$A22 38.86,26.88 39.37,27.39 40,27.39 C12.1 40.13,27.52 40.13,28.28 40.89,29.04 40.89,30.18 39.62,31.45 31.75,31.45 | 33.53,21.67 33.66,21.55 33.78,21.55 U1.P$Y2 | 33.53,21.67 33.4,21.8 U1.P$W1 | v33.4,27.39 33.27,27.26 33.27,26.37 U1.P$B1 | C6.1 31.11,28.41 31.75,29.04 v31.75,29.42 32.51,30.18 32.51,30.69 31.75,31.45 | 33.53,21.67 33.15,21.29 v33.15,21.17 | 31.75,31.45 31.5,31.71 28.07,31.71 27.3,30.95 27.3,30.44 27.69,30.06 27.81,30.06 28.07,29.8 C14.1 | 39.37,19.64 39.5,19.64 v39.61,19.53 | v37.21,19.64 36.83,20.02 | 35.43,18.63 35.88,19.08 36.22,19.08 36.79,19.65 36.79,19.99 36.83,20.02
  Bottom 0.152: 18.92,21.93 v17.53,21.93 16.89,21.93 16.13,21.17 16.13,16.85 v16.51,16.47 16.76,16.21 16.76,10.12 v15.62,8.97 | v33.15,21.17 33.4,21.42 33.4,26.12 | 33.4,26.12 v33.4,27.39 31.75,29.04 v31.75,29.42 31.24,29.93 31.24,33.36 17.65,33.36 17.14,32.85 17.14,30.56 18.92,28.79 18.92,21.93 | 38.99,20.15 38.99,25.74 38.61,26.12 33.4,26.12 | v37.21,19.64 38.99,19.64 38.99,20.15 | 18.92,21.93 v19.18,21.93 | 38.99,20.15 v39.61,19.53
DN  (via drill 0.35)
  Top 0.152: 22.35,26.63 22.86,26.63 22.99,26.75 22.99,27.39 J4.B7 | 22.35,26.63 22.1,26.88 22.1,27.39 J4.A7 | v23.62,9.23 24.64,9.23 26.54,7.32 26.92,7.32 D3.1 | 22.35,26.63 v22.35,26.25
  Bottom 0.152: v23.62,9.23 22.99,9.86 22.99,25.61 v22.35,26.25
DP  (via drill 0.35)
  Top 0.152: 22.35,28.28 21.84,28.28 21.59,28.02 21.59,27.52 J4.B6 | 22.35,28.28 22.48,28.15 22.48,27.52 J4.A6 | v25.78,5.42 26.92,5.42 D3.3 | 22.35,28.28 v22.73,28.66
  Bottom 0.152: v25.78,5.42 24.26,6.94 24.26,27.14 v22.73,28.66
EPD_3V3  (via drill 0.35)
  Top 0.152: C1-EP-DR.1 0.76,25.23 1.27,25.74 3.18,25.74 6.1,28.66 L5.2 6.22,28.66 v8.51,28.66 | 14.1,18.25 13.59,18.75 v9.4,18.75 8.51,18.75 J1.15 8.51,18.88 8.51,19.26 J1.16 | 14.1,18.25 14.6,17.74 14.6,17.48 EPD_C5.2 | v22.35,17.86 23.11,17.1 Q2.3 | 14.1,18.25 v16.76,20.91
  Bottom 0.152: v22.35,17.86 20.96,19.26 20.96,20.53 20.07,21.42 19.56,21.42 19.3,21.17 16.76,21.17 v16.76,20.91 | v8.51,28.66 9.4,27.77 v9.4,18.75
GDR  (via drill 0.35)
  Top 0.152: 13.97,32.47 13.97,31.07 Q3.1 | 13.97,32.47 13.97,33.1 R2_EP_DR.2 | v9.53,11.9 9.4,11.9 9.02,12.28 8.64,12.28 J1.2 | 13.97,32.47 v14.1,32.47
  Bottom 0.152: v9.53,11.9 10.03,12.4 10.03,30.18 12.32,32.47 v14.1,32.47
GND  (via drill 0.35)
  Top 0.152: R3.2 19.56,15.71 18.29,14.44 18.29,13.8 C24.1 18.16,13.67 14.99,13.67 | 14.99,11.9 14.22,11.9 13.59,11.26 EPD_C1.1 13.33,11.13 11.3,11.13 J1.MP1 | 14.99,11.9 15.87,11.9 C23.2 | 14.1,15.07 14.1,14.31 13.59,13.8 EPD_C2.1 | 14.1,15.07 14.1,15.32 | 14.1,15.32 14.1,17.36 EPD_C5.1 | 14.1,15.32 8.64,15.32 J1.8 8.51,15.45 8,15.45 7.87,15.58 7.87,19.64 8,19.77 8.38,19.77 J1.17 8.51,19.9 13.21,19.9 EPD_C6.1 13.59,20.15 13.59,21.42 | 14.99,13.67 14.99,14.18 14.1,15.07 | 14.99,13.67 14.99,11.9 | 13.33,4.53 12.32,5.55 12.32,5.8 C30.2 12.32,5.93 12.32,7.7 14.99,10.37 14.99,11.9 | 13.33,4.53 13.33,4.15 SW_UP.1 13.33,4.53 | IC9.B1 19.81,11.13 19.81,10.88 IC9.C1 19.94,10.75 20.19,10.75 IC9.C2 20.32,10.75 20.57,10.75 IC9.C3 20.7,10.75 20.96,10.75 21.72,9.99 21.72,8.59 | 21.72,8.59 21.72,7.58 21.08,6.94 | 21.08,6.94 20.57,6.43 C33.2 20.57,6.31 18.8,4.53 13.33,4.53 | 21.72,8.59 23.37,6.94 23.37,6.31 C31.2 23.5,6.18 25.15,4.53 | v17.53,6.43 17.14,6.82 17.14,7.45 C25.2 | 21.08,6.94 v20.7,7.32 | IC2.B1 39.5,9.48 37.59,9.48 35.69,7.58 TP4.TP 35.56,7.58 34.92,7.58 34.54,7.96 33.91,7.96 27.69,1.73 27.69,0.72 27.3,0.34 27.05,0.34 26.54,0.85 C42.2 26.54,0.97 26.54,2.12 26.42,2.24 C43.2 26.29,2.37 26.29,2.75 25.15,3.89 | 25.15,3.89 24.51,3.89 SW_ENT.1 | 25.15,3.89 25.15,4.53 | 25.15,4.53 25.15,5.67 25.65,6.18 26.92,6.18 D3.2 | C8.2 40.64,18.88 40.64,19.7 41.66,20.72 41.66,21.04 C3.2 | C3.2 41.66,21.17 41.66,21.83 41.73,21.91 41.73,22.41 41.38,22.76 40.79,22.76 C9.2 | C10.2 43.18,27.77 43.18,27.52 42.8,27.14 C11.2 42.67,27.14 42.67,25.99 42.29,25.61 X1.4 42.29,25.48 42.67,25.1 42.8,25.1 43.56,24.34 X1.2 43.69,24.34 45.59,24.34
  Top 0.152: 45.59,24.34 45.59,24.98 C2.2 45.47,25.1 45.47,27.14 43.05,29.55 41.91,29.55 | 45.59,24.34 45.59,23.58 C1.2 45.47,23.45 45.47,23.2 45.21,22.94 45.21,22.31 C4.2 45.21,22.18 45.21,21.29 C22.2 45.09,21.17 45.09,20.91 44.83,20.66 43.81,20.66 | 41.91,29.55 40.64,28.28 40.64,27.52 C12.2 | 43.81,20.66 43.69,20.66 43.31,21.04 41.78,21.04 C3.2 | 43.81,9.74 44.83,10.75 C32.2 44.83,10.88 43.81,11.9 43.81,20.66 | 43.81,9.74 43.69,9.61 40.64,9.61 IC2.B3 | 43.81,9.74 43.94,9.74 45.21,8.47 C34.1 45.34,8.34 45.59,8.34 45.72,8.21 45.72,7.58 43.94,5.8 41.27,5.8 U3.6 41.15,5.8 40.39,5.8 | C29.2 33.53,5.55 34.29,5.55 35.31,4.53 35.31,4.15 SW_DN.1 35.43,4.02 36.07,4.02 36.96,3.13 36.96,1.61 37.08,1.48 37.59,1.48 37.97,1.86 C27.2 37.97,1.99 37.97,3.39 | U3.1 39.24,6.69 39.62,6.69 40.26,6.05 U3.9 | 40.39,5.8 40.26,5.93 U3.9 | 37.97,3.39 37.97,4.02 39.12,5.16 U3.4 | 37.97,3.39 40.39,5.8 | 40.39,5.8 U3.9 | 40,30.06 40.26,29.8 C15.2 | 40,30.06 39.62,30.44 38.86,30.44 C13.2 38.73,30.56 38.73,30.82 38.48,31.07 35.18,31.07 33.66,29.55 | 40,30.06 40,28.79 C16.2 | 31.5,27.26 31.11,27.26 C37.1 30.99,27.39 30.73,27.64 30.61,27.64 30.35,27.9 30.35,29.17 C17.1 30.23,29.29 29.85,29.29 29.46,29.68 C14.2 29.34,29.68 27.05,27.39 | 31.5,27.26 31.88,26.88 C39.1 | 33.66,29.55 33.66,29.29 C5.2 | 33.66,29.55 33.4,29.8 33.02,29.8 32.38,29.17 32.38,28.41 C6.2 32.26,28.28 31.5,27.52 31.5,27.26 | IC3.9 18.03,20.91 18.42,20.91 IC3.8 18.54,20.91 18.54,22.18 19.56,23.2 C38.1 19.69,23.2 20.7,24.21 | 20.7,24.21 21.46,24.98 C19.2 | IC1.D2 29.85,24.72 29.85,26.12 R9.2 29.72,26.25 29.34,26.25 | 26.67,27.39 25.65,27.39 J4.A1_B12
  Top 0.152: 26.67,27.39 27.05,27.39 | 27.05,27.39 27.3,27.39 | 27.3,27.39 27.56,27.39 C18.1 | 29.34,26.25 28.45,26.25 27.3,27.39 | 20.7,24.21 21.59,23.33 26.42,23.33 29.34,26.25 | C1-EP-DR.2 1.78,25.23 3.43,25.23 3.94,25.74 7.75,25.74 8,25.99 TP_GND.TP 8.13,26.12 8.51,26.5 EPD_C12.1 9.78,26.5 10.41,27.14 11.56,27.14 EPD_C11.1 | 14.73,25.99 14.48,25.99 13.97,25.48 EPD_C10.1 13.84,25.36 12.95,24.47 | 14.73,25.99 15.87,25.99 R_TYPE_SEL.1 16,26.12 16.76,26.12 18.29,27.64 | 14.73,25.99 14.73,27.39 SJ1.1 | 12.19,25.23 EPD_C11.1 | 12.19,25.23 11.18,24.21 J1.MP2 | 13.59,22.69 13.59,23.96 EPD_C9.1 12.95,24.47 | 13.59,21.42 13.59,22.69 | 13.59,22.69 EPD_C8.1 | 13.59,21.42 EPD_C7.1 | 12.95,24.47 12.19,25.23 | EPD_C11.1 | 16.76,32.34 R1_USB.1 | 16.76,32.34 15.49,33.61 13.97,33.61 R2_EP_DR.1 13.84,33.74 13.33,34.25 6.22,34.25 4.83,32.85 3.18,32.85 D4.1 | 16.76,32.34 R2_USB.2 16.89,32.34 17.78,32.34 17.91,32.22 J4.SH2 | U1.P$76 35.05,26.25 U1.P$B7 | U1.P$F23 39.24,25.1 38.35,24.21 U1.P$74 U1.P$76 | 34.04,19.52 33.53,19.52 33.02,19.01 C21.2 32.89,18.88 32.26,18.25 31.11,18.25 29.97,19.39 29.97,20.28 30.1,20.4 30.1,21.04 C20.2 | 34.04,19.52 34.8,19.52 35.05,19.26 35.05,19.13 C7.2 | J2.3 32.38,12.78 33.53,12.78 J2.5 33.66,12.66 33.66,12.15 v34.42,11.39 | 18.29,27.64 18.03,27.9 J4.SH4 18.29,27.64 | 18.29,27.64 18.42,27.52 19.05,27.52 J4.A12_B1 | v34.04,19.64 34.04,19.52 | U1.P$76 | 26.67,27.39 26.67,27.9 J4.SH3 | 41.91,29.55 41.27,30.18 41.27,30.31 39.5,32.09 26.8,32.09 J4.SH1
  Bottom 0.152: v17.53,6.43 20.7,6.43 v20.7,7.32 | v34.42,11.39 34.16,11.64 34.16,15.45 34.69,15.98 34.69,17.91 34.67,17.94 34.67,19.64 | 34.67,19.64 34.67,21.67 U1.P$87 | 34.67,19.64 v34.04,19.64
  pour Route2: -6.35,40.47 49.53,40.47 49.53,-3.98 -6.35,-3.98
IMU_INT1  (via drill 0.35)
  Top 0.152: v27.3,21.8 20.83,21.8 v19.81,20.79 | v18.29,20.15 18.54,20.15 18.8,19.9 19.05,19.9 IC3.5 | v31.88,21.93 32.7,22.75 32.77,22.75 33.13,23.1 33.13,23.14 U1.P$N1
  Bottom 0.152: v31.88,21.93 31.62,21.67 31.62,18.75 30.35,17.48 28.96,17.48 28.96,20.15 v27.3,21.8 | v19.81,20.79 18.29,20.79 v18.29,20.15
IMU_INT2  (1 unrouted)
LX1
  Top 0.152: IC9.B2 20.32,11.26 20.57,11.26 IC9.B3 20.7,11.26 20.83,11.26 21.08,11.51 21.08,11.77 20.83,12.02 18.67,12.02 17.65,11.01 17.02,11.01 L7.1
LX2  (via drill 0.35)
  Top 0.152: IC9.D2 20.32,10.37 20.57,10.37 IC9.D3 20.7,10.37 20.83,10.37 21.08,10.12 v21.08,9.1 | v18.03,7.83 18.03,8.09 17.27,8.85 L7.2
  Bottom 0.152: v21.08,9.1 19.3,7.32 18.03,7.32 v18.03,7.83
N$1
  Top 0.152: IC1.D1 30.23,24.85 30.23,26.5 29.85,26.88 R9.1
N$2  (via drill 0.35)
  Top 0.152: v17.4,18.5 17.53,18.63 17.53,19.26 IC3.1 | v20.19,18.5 20.19,19.26 19.81,19.64 19.56,19.64 R3.1
  Bottom 0.152: v20.19,18.5 v17.4,18.5
N$3
  Top 0.152: L2.2 35.69,29.29 36.58,29.29 L3.1
N$4  (via drill 0.35)
  Top 0.152: v6.86,24.98 C2-EP-DR.2 | 4.19,28.41 1.9,28.41 1.65,28.66 L5.1 | 4.19,28.41 v4.95,28.41 | v16,31.45 16,30.31 Q3.3 | 4.19,28.41 4.19,31.71 6.35,33.87 9.02,33.87 9.65,33.23 11.81,33.23 D5.2
  Bottom 0.152: v6.86,24.98 4.95,26.88 v4.95,28.41 6.22,29.68 6.22,33.1 14.35,33.1 v16,31.45
N$6
  Top 0.152: IC9.D1 19.81,10.37 19.69,10.37 18.8,9.48 18.8,9.23 R4.1
N$8  (via drill 0.35)
  Top 0.152: v19.56,9.36 19.81,9.61 19.81,9.99 IC9.E1 | v17.78,16.09 17.53,16.09 17.02,15.58 R2.1
  Bottom 0.152: v19.56,9.36 20.07,9.86 20.07,13.8 v17.78,16.09
N$10  (via drill 0.35)
  Top 0.152: L1.2 44.07,22.94 44.7,22.31 C4.1 44.7,22.18 44.7,21.29 C22.1 44.58,21.29 v43.94,21.29 | v42.93,16.09 41.78,14.94 ANT1.1
  Bottom 0.152: v43.94,21.29 42.93,20.28 v42.93,16.09
N$11
  Top 0.152: U1.P$AC5 34.54,20.79 34.04,20.79 33.91,20.66 33.53,20.66 33.4,20.53 31.75,20.53 30.48,21.8 29.46,21.8 28.83,21.17 C20.1
N$12  (via drill 0.35)
  Top 0.152: v4.06,24.98 C2-EP-DR.1 | v5.59,31.96 5.84,31.96 6.22,32.34 | 6.22,32.34 6.6,32.72 D4.2 | 6.22,32.34 8,30.56 8,29.68 D2.1
  Bottom 0.152: v4.06,24.98 4.32,25.23 4.32,30.69 v5.59,31.96
N$13
  Top 0.152: U1.P$C1 33.27,25.87 32.77,26.37 32.77,27.64 33.15,28.02 33.15,29.17 C5.1
N$14  (via drill 0.35)
  Top 0.152: v33.91,28.41 34.04,28.28 34.04,27.14 33.66,26.75 33.66,26.25 33.78,26.12 33.78,25.61 U1.P$D2 | 31.11,29.68 30.73,29.29 C17.2 | 31.11,29.68 v31.88,30.44 | v27.56,26.12 26.04,24.6 N2.2 | 31.11,29.68 v30.35,30.44
  Bottom 0.152: v31.88,30.44 v33.91,28.41 | v27.56,26.12 28.32,26.88 28.32,28.41 v30.35,30.44
N$15  (via drill 0.35)
  Top 0.152: v32.13,25.48 33.15,25.48 33.53,25.1 33.78,25.1 U1.P$F2 | v29.21,28.41 28.19,27.39 C18.2 | v25.65,26.12 24.13,24.6 23.5,24.6 N2.1
  Bottom 0.152: 29.34,28.28 v32.13,25.48 | v25.65,26.12 26.92,24.85 28.7,24.85 28.7,27.64 29.34,28.28 | 29.34,28.28 v29.21,28.41
N$16
  Top 0.152: U1.P$D23 39.37,25.61 39.62,25.61 40,25.99 40.89,25.99 42.04,27.14 C11.1
N$17
  Top 0.152: U1.P$B3 34.04,26.37 34.04,26.63 34.54,27.14 34.54,29.29 L2.1
N$18  (via drill 0.35)
  Top 0.152: 37.08,28.91 37.46,29.29 L3.2 | 37.08,28.91 36.96,28.79 36.7,28.79 34.92,27.01 34.92,26.75 34.54,26.37 U1.P$B5 | C16.1 39.37,29.68 C15.1 | v40.51,25.36 39.88,25.36 U1.P$E24 | v42.67,28.53 42.67,27.77 C10.1 | v39.37,28.02 C16.1 | C16.1 | v37.72,28.28 37.08,28.91
  Bottom 0.152: 41.27,26.12 42.67,27.52 v42.67,28.53 | 41.27,26.12 v40.51,25.36 | 41.27,26.12 v39.37,28.02 39.37,28.28 v37.72,28.28
N$20
  Top 0.152: 43.69,26.37 43.69,25.61 X1.3 | 43.69,26.37 43.69,28.41 42.93,29.17 42.04,29.17 41.15,28.28 41.15,27.26 40.77,26.88 39.37,26.88 U1.P$A23 | 43.69,26.37 44.96,25.1 C2.1
N$21
  Top 0.152: U1.P$A18 37.85,26.88 37.85,27.52 38.35,28.02 38.35,30.44 C13.1
N$22  (via drill 0.35)
  Top 0.152: v41.78,28.02 41.78,27.39 40.77,26.37 39.88,26.37 U1.P$B24 | v43.31,22.06 43.31,22.31 43.56,22.56 43.56,23.45 43.69,23.58 | 43.69,23.58 44.96,23.58 C1.1 | 43.69,23.58 43.05,23.58 42.29,24.34 X1.1
  Bottom 0.152: v41.78,28.02 42.04,28.28 42.04,28.79 42.42,29.17 43.31,29.17 v43.31,22.06
N$23  (via drill 0.35)
  Top 0.152: v40.13,10.75 40.13,10.12 IC2.A2 | v42.93,10.75 43.81,10.75 C32.1
  Bottom 0.152: v42.93,10.75 v40.13,10.75
N$24  (via drill 0.35)
  Top 0.152: U1.P$H23 39.37,24.6 39.5,24.6 39.62,24.72 40.64,24.72 v42.04,23.33 42.29,23.07 43.05,23.07 L1.1 | C3.1 41.18,21.13 41.18,21.67 41.13,21.73 v41.13,22.16
  Bottom 0.152: v42.04,23.33 41.13,22.42 v41.13,22.16
N$27
  Top 0.152: C9.1 40.13,22.91 40.13,22.95 39.8,23.28 U1.P$N24
N$28  (via drill 0.35)
  Top 0.152: v14.35,12.91 14.35,13.8 EPD_C2.2 | v12.57,12.91 9.4,12.91 9.02,13.29 8.64,13.29 J1.4
  Bottom 0.152: v12.57,12.91 v14.35,12.91
N$29
  Top 0.152: EPD_C1.2 14.35,11.26 13.72,10.62 8.89,10.62 8,11.51 8,13.67 8.13,13.8 8.51,13.8 J1.5
N$30  (via drill 0.35)
  Top 0.152: v19.18,32.6 18.42,33.36 17.65,33.36 17.27,32.98 16.89,32.98 R2_USB.1 | v19.18,30.31 20.57,28.91 20.57,27.52 J4.B5
  Bottom 0.152: v19.18,30.31 v19.18,32.6
N$31  (via drill 0.35)
  Top 0.152: v16.64,25.48 16,25.48 R_TYPE_SEL.2 | v16.64,28.79 16.64,27.9 SJ1.2 | v12.7,31.83 12.7,32.47 13.21,32.98 13.33,32.98 R1_EP_DR.1
  Bottom 0.152: v16.64,28.79 16.64,27.9 | 16.64,27.9 v16.64,25.48 | 16.64,27.9 v12.7,31.83
N$33  (via drill 0.35)
  Top 0.152: v21.46,28.91 19.43,30.95 16.76,30.95 R1_USB.2 | v23.37,26.25 23.37,26.63 23.5,26.75 23.5,27.39 J4.A5
  Bottom 0.152: v21.46,28.91 23.37,27.01 v23.37,26.25
N$41  (via drill 0.35)
  Top 0.152: EPD_C6.2 15.11,20.15 v15.37,20.4 | v11.94,20.53 9.02,20.53 8.89,20.4 8.51,20.4 J1.18
  Bottom 0.152: v15.37,20.4 11.94,20.4 v11.94,20.53
N$42  (via drill 0.35)
  Top 0.152: v15.37,21.42 EPD_C7.2 | v11.94,21.55 9.53,21.55 8.89,20.91 8.51,20.91 J1.19
  Bottom 0.152: v15.37,21.42 11.94,21.42 v11.94,21.55
N$43  (via drill 0.35)
  Top 0.152: v15.37,22.69 EPD_C8.2 | v11.94,22.69 11.3,22.69 10.54,21.93 9.4,21.93 8.89,21.42 8.51,21.42 J1.20
  Bottom 0.152: v11.94,22.69 v15.37,22.69
N$45  (via drill 0.35)
  Top 0.152: v13.97,19.26 13.97,24.47 14.86,25.36 EPD_C10.2 | v8.51,24.09 8.25,24.09 7.75,23.58 7.75,22.69 8,22.44 8.38,22.44 J1.22
  Bottom 0.152: v13.97,19.26 11.94,17.23 11.94,12.02 11.18,11.26 8.51,11.26 v8.51,24.09
N$47
  Top 0.152: EPD_C12.2 10.54,26.5 10.54,25.23 8.76,23.45 8.51,23.45 J1.24
OUT+
  Top 0.152: IC2.A3 40.64,10.12 40.64,10.37 42.42,12.15 42.42,12.78 TP1.TP
OUT-  (via drill 0.35)
  Top 0.152: v41.02,7.45 40.51,7.96 40.51,8.97 IC2.C3 | v42.42,4.4 43.43,3.39 TP2.TP
  Bottom 0.152: v41.02,7.45 42.42,6.05 v42.42,4.4
P0.13/1.5D
  Top 0.152: 10.67,5.67 11.05,5.67 11.18,5.8 C30.1 | 10.67,5.67 9.65,5.67 R5.1 | 10.67,5.67 10.67,4.15 SW_UP.2
P0.14/1.5D  (via drill 0.35)
  Top 0.152: v21.72,16.47 20.45,16.47 R8.1 | v22.23,7.2 22.23,6.43 22.35,6.31 C31.1 22.35,6.18 21.72,5.55 21.72,4.02 SW_ENT.2
  Bottom 0.152: v21.72,16.47 22.23,15.96 v22.23,7.2
P1.01/1.6C
  Top 0.152: R_PWR_EPD.1 21.97,20.53 22.1,20.53 22.99,19.64 Q2.1
P1.02/1.5D
  Top 0.152: R7.1 34.29,7.45 34.16,7.45 32.64,5.93 32.64,5.67 C29.1 32.64,5.55 32.64,4.15 SW_DN.2
PMIC_INT  (1 unrouted)
PREVGH  (via drill 0.35)
  Top 0.152: v15.37,23.96 EPD_C9.2 | v11.94,27.9 8.51,31.33 8.51,31.58 | 8.51,31.58 8.51,33.1 D5.1 | v7.49,21.93 8.38,21.93 J1.21 | 8.51,31.58 v7.87,31.58
  Bottom 0.152: v15.37,23.96 11.94,27.39 v11.94,27.9 | v7.49,21.93 7.87,22.31 v7.87,31.58
PREVGL  (via drill 0.35)
  Top 0.152: 13.08,26.5 13.08,28.15 11.68,29.55 D2.2 | v12.19,24.21 10.92,22.94 8.51,22.94 J1.23 | v12.83,25.61 12.83,26.25 13.08,26.5 | 13.08,26.5 EPD_C11.2
  Bottom 0.152: v12.19,24.21 12.83,24.85 v12.83,25.61
RESE  (via drill 0.35)
  Top 0.152: 13.08,30.56 13.08,30.44 13.84,29.68 Q3.2 | 13.08,30.56 13.08,31.33 13.33,31.58 13.33,32.47 R1_EP_DR.2 | v10.67,12.28 10.41,12.53 9.27,12.53 9.02,12.78 8.64,12.78 J1.3 | 13.08,30.56 v11.3,30.56
  Bottom 0.152: v10.67,12.28 11.3,12.91 v11.3,30.56
RESET  (via drill 0.35)  (1 unrouted)
  Top 0.152: v34.8,13.29 34.16,13.93 33.66,13.93 J2.6 35.56,16 v35.56,16.34 | v25.4,14.82 25.4,15.32 TP_RESET.TP | v35.97,19.68 36.14,19.68 36.49,20.03
  Route2 0.152: v35.56,16.34 v36.83,16.34
  Route63 0.152: v36.83,16.34 36.37,16.8 v36.37,18.47
  Bottom 0.152: v34.8,13.29 35.43,12.66 35.43,11.39 30.35,6.31 25.4,6.31 v25.4,14.82 | v36.37,18.47 36.37,18.68 35.97,19.08 v35.97,19.68
SCL/1.4C  (via drill 0.35)
  Top 0.152: v39.12,8.47 39.62,8.97 IC2.C1 | v42.04,7.32 42.04,6.69 41.66,6.31 41.27,6.31 U3.7
  Bottom 0.152: v39.12,8.47 39.88,7.7 40.39,7.7 40.77,8.09 41.27,8.09 v42.04,7.32
SCL/2.4C  (via drill 0.35)  (1 unrouted)
  Top 0.152: 19.05,8.59 19.3,8.59 19.69,8.21 R17.2 | 19.05,8.59 18.8,8.59 R4.2 | 24.38,12.4 v30.1,18.12 | 24.38,12.4 24.38,11.9 TP_SCL.TP 24.38,12.4 | IC1.B1 30.61,24.09 30.73,24.21 v31.24,24.21 31.5,24.21 v31.75,23.96 | v16.76,19.77 17.4,19.77 IC3.12 | v21.21,13.55 21.46,13.55 22.61,12.4 24.38,12.4 | v19.05,7.96 19.05,8.59
  Route2 0.152: v31.75,23.96 34.06,23.96 34.18,23.85
  Bottom 0.152: v31.24,24.21 31.24,19.26 v30.1,18.12 | v16.76,19.77 16.76,17.99 v21.21,13.55 21.21,10.12 v19.05,7.96
SDA/1.4C  (1 unrouted)
  pour Route63: -15.24,41.74 54.61,41.74 53.34,-7.79 -15.24,-7.79
SDA/2.4C  (via drill 0.35)
  Top 0.152: 17.14,14.94 17.53,15.32 R2.2 | 17.14,14.94 16.89,14.69 15.49,14.69 R18.2 15.37,14.56 14.99,14.94 14.99,15.83 16.26,17.1 16.89,17.1 18.03,18.25 18.03,19.26 IC3.2 | 32.51,23.83 33.27,23.83 U1.P$L1 | IC1.C1 30.48,24.47 30.86,24.85 31.72,24.85 32.36,24.21 32.36,23.99 32.51,23.83 | 32.51,23.83 32.51,23.45 32.52,23.44 v32.52,23.35 | v27.69,12.53 26.8,12.53 24.13,9.86 23.5,9.86 | 23.5,9.86 23.37,9.86 22.99,9.48 22.99,8.97 24.64,7.32 TP_SDA.TP | v17.4,14.69 17.14,14.94 | v19.43,12.66 20.7,12.66 23.5,9.86
  Bottom 0.152: v27.69,12.53 29.85,12.53 31.11,13.8 31.11,15.96 32.51,17.36 v32.51,23.35 v32.52,23.35 | v19.43,12.66 v17.4,14.69
SWDCLK  (via drill 0.35)
  Top 0.152: v28.7,14.56 30.23,14.56 30.35,14.69 31.24,14.69 31.88,14.05 32.26,14.05 J2.4 32.27,14.67 31.6,15.34 31.6,16.42 32.36,17.19 33.61,17.19 v34.09,17.66 | v28.32,17.86 28.32,19.13 28.57,19.39 TP_SWDCLK.TP | v40.58,21.42 40.47,21.31 U1.P$AA24
  Route2 0.152: v34.09,17.66 36.82,17.66 v40.58,21.42
  Bottom 0.152: v28.7,14.56 28.32,14.94 v28.32,17.86
SWDIO  (via drill 0.35)
  Top 0.152: TP_SWDIO.TP 42.42,19.13 41.78,18.5 v41.78,17.74 41.78,17.1 33.78,9.1 29.46,9.1 28.32,10.24 28.32,11.26 29.21,12.15 29.46,12.15 30.99,13.67 30.99,13.93 J2.2 | U1.P$AC24 39.83,20.79 40.32,20.79 v40.59,20.51
  Bottom 0.152: v41.78,17.74 41.78,19.32 v40.59,20.51
SWO
  Top 0.152: U1.P$AD22 38.86,20.28 38.86,18.63 40.13,17.36 TP_SWO.TP
VBAT/1.2A
  Top 0.152: U3.2 39.24,6.18 39.24,5.8 U3.3 39.12,5.67 38.35,5.67 37.34,4.66 | 37.34,4.66 37.34,1.99 C27.1 | 37.34,4.66 36.83,5.16 TP3.TP 37.34,4.66
VBAT/2.5C  (via drill 0.35)
  Top 0.152: v29.34,24.21 29.85,24.21 29.97,24.34 IC1.C2 | v29.34,27.39 30.23,27.39 30.99,26.63 C37.2
  Bottom 0.152: v29.34,27.39 v29.34,24.21
VBUS/1.5D  (via drill 0.35)
  Top 0.152: C42.1 27.3,0.97 27.3,2.24 C43.1 27.43,2.37 27.43,4.53 28.57,5.67 28.57,5.8 28.96,6.18 | 28.96,6.18 29.34,6.18 D3.5 28.96,6.18 | v22.99,29.68 24.64,28.02 24.64,27.52 J4.A4_B9 | v19.3,29.29 19.94,28.66 19.94,27.52 J4.A9_B4 | v28.19,6.94 28.96,6.18
  Bottom 0.152: v19.3,29.29 19.3,29.68 v22.99,29.68 24.64,28.02 24.64,23.58 27.05,21.17 27.05,8.09 v28.19,6.94
VBUS/2.6D  (via drill 0.35)
  Top 0.152: U1.P$AD2 33.78,20.28 33.15,19.64 32.38,19.64 31.75,19.01 C21.1 31.62,19.01 v30.61,20.02 | v30.35,22.44 30.35,23.58 IC1.A2 | v27.94,22.56 19.69,22.56 C38.2
  Bottom 0.152: v30.61,20.02 30.61,22.18 v30.35,22.44 30.35,22.56 v27.94,22.56
VREG  (via drill 0.35)
  Top 0.152: IC9.A3 20.57,11.64 20.32,11.64 IC9.A2 20.19,11.64 19.94,11.64 IC9.A1 19.81,11.64 v19.18,11.01 | C23.1 16.13,12.53 v18.29,12.53 19.43,13.67 C24.2 19.56,13.8 20.57,13.8 20.96,14.18 22.61,14.18 TP_VREG.TP 22.73,14.18 25.65,14.18 26.04,14.56 26.04,18.63 27.94,20.53 27.94,21.67 v29.46,23.2 IC1.B2 | v31.11,25.48 31.88,26.25 C39.2
  Bottom 0.152: v19.18,11.01 18.29,11.9 v18.29,12.53 | v31.11,25.48 29.97,24.34 29.97,23.71 v29.46,23.2